# Altium PCB testSensor.PcbDoc
Units mm, origin at the board's own origin, x right, y up, seen from the top; angles counter-clockwise.
Board outline 152.4 x 101.6 mm, 2 copper layers (Top Layer, Bottom Layer); 37 components, 18 nets, 72 pads, 0 vias.
Unrouted connection lines stored in the file: 1.
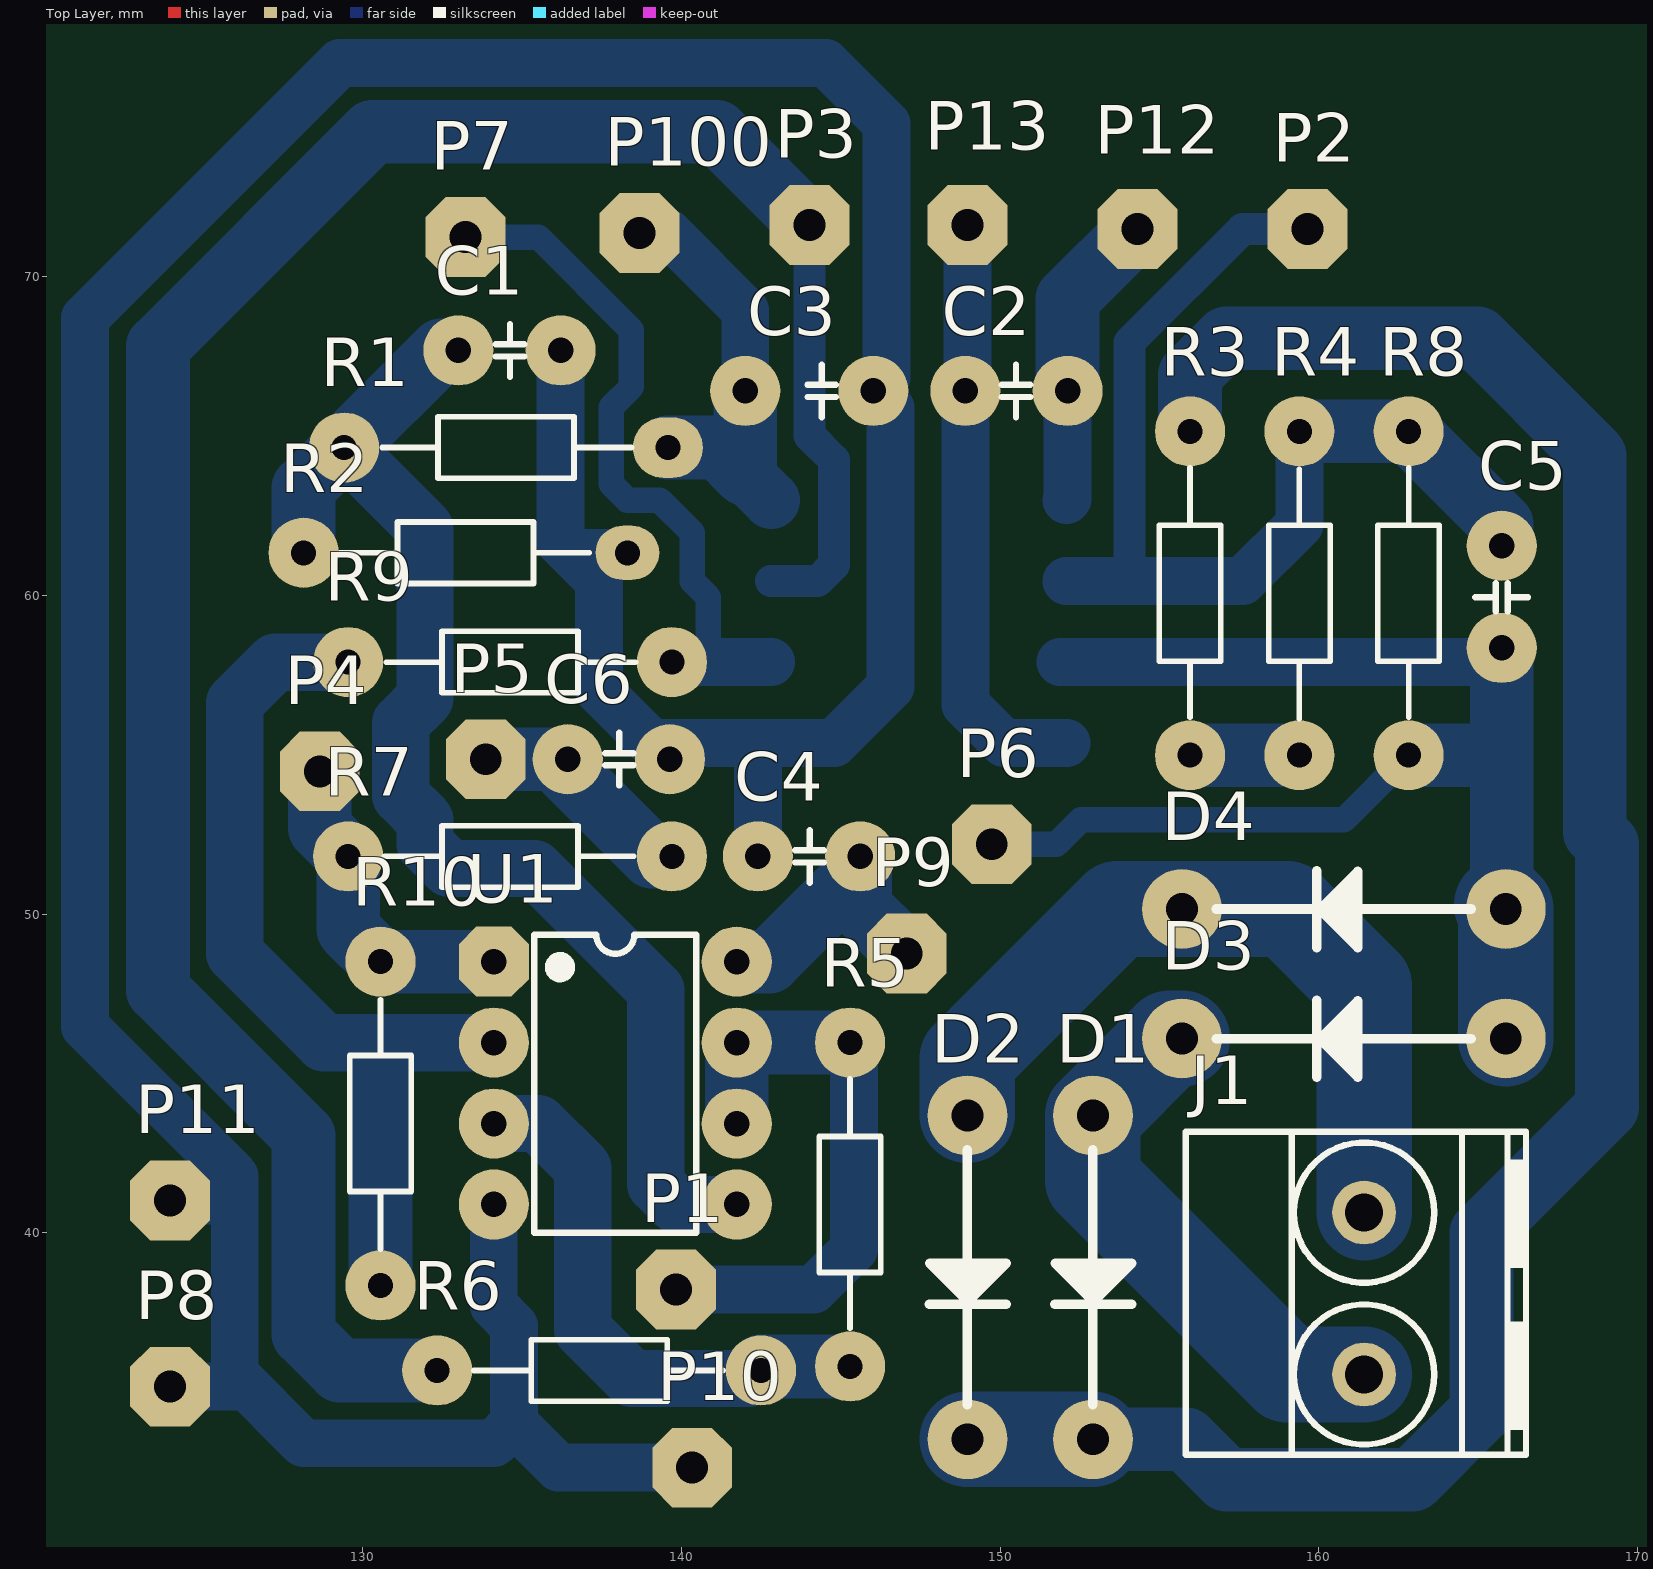
[diagram p0: Top Layer view]
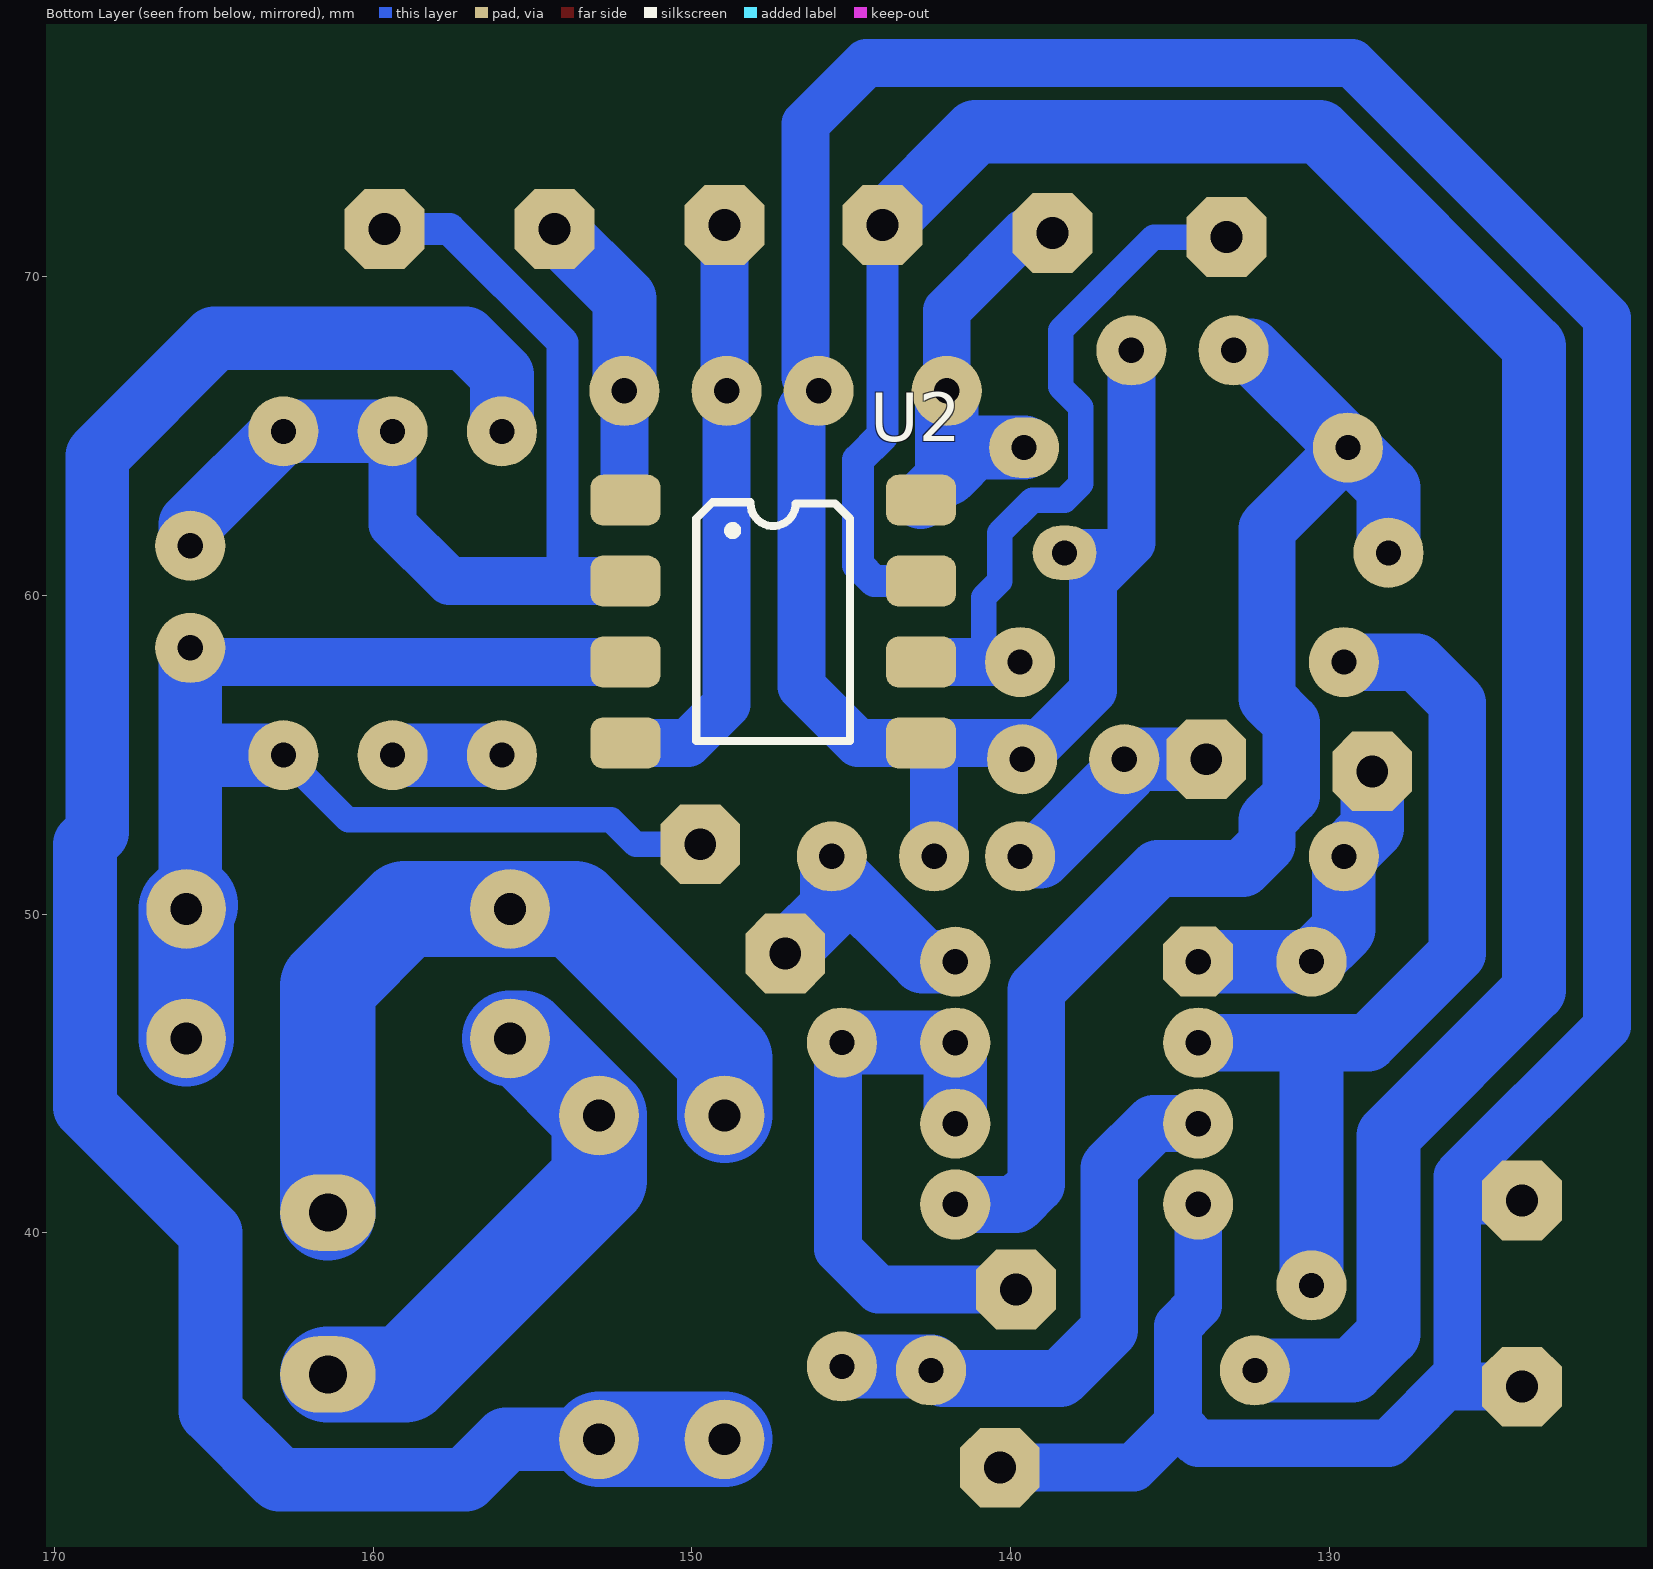
[diagram p1: Bottom Layer view, seen from below]
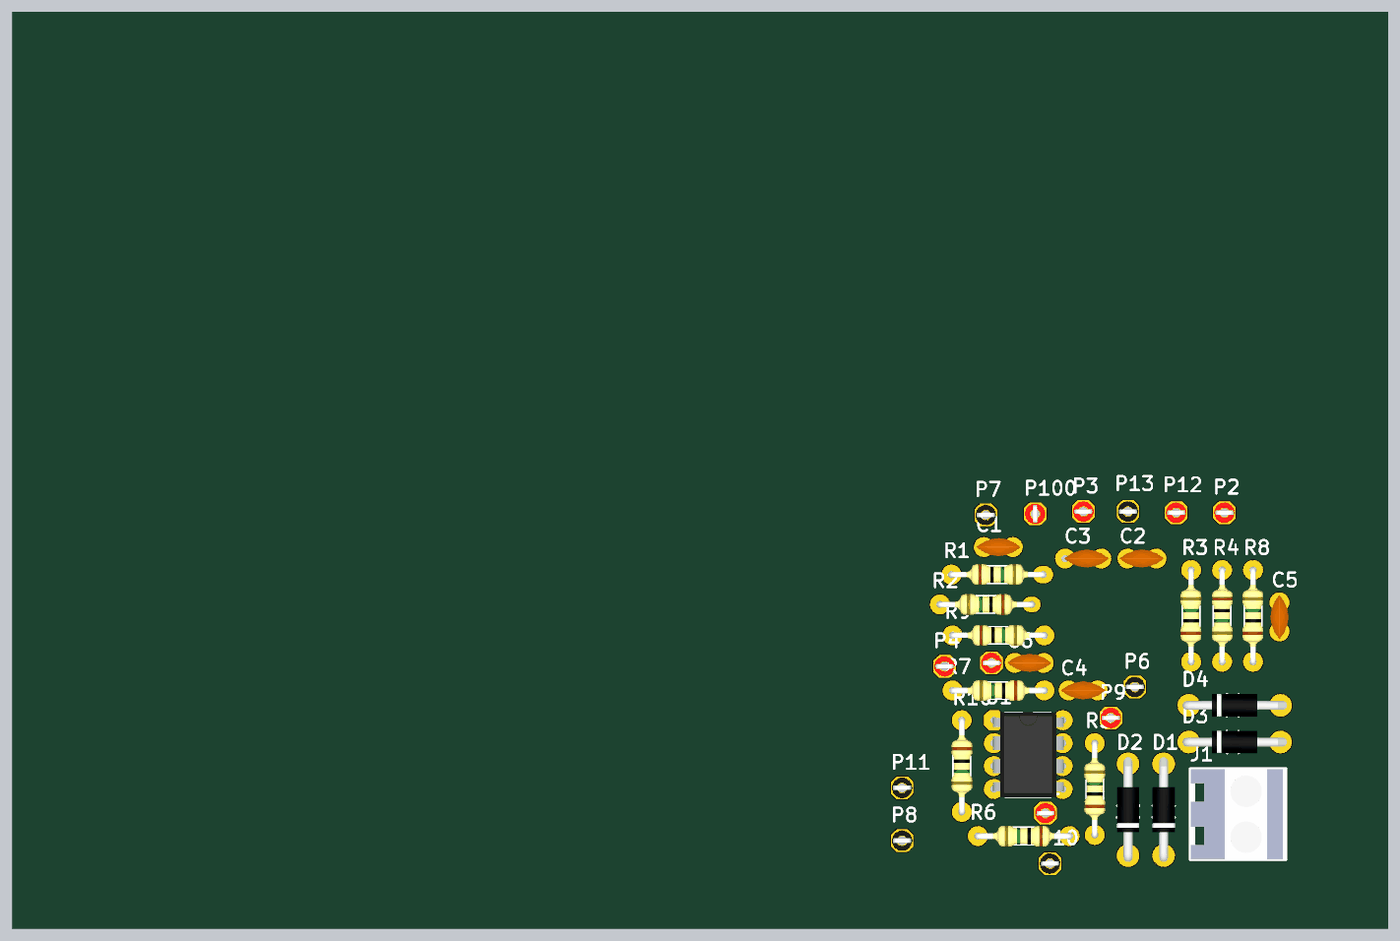
[diagram p2: 3D render of the assembled board from above, using the file's embedded part models]

## Layer stack, top to bottom
Top Solder: solder mask 0.0102, Solder Resist, Dk 3.5
Top Layer: signal copper 0.0356
Dielectric 1: dielectric 0.32, FR-4, Dk 4.8
Bottom Layer: signal copper 0.0356
Bottom Solder: solder mask 0.0102, Solder Resist, Dk 3.5

## Board outline
25.4,25.4 177.8,25.4 177.8,127 25.4,127

## Design rules (kind name [scope] priority, off if disabled: settings)
Clearance [All] p1: gap=0.254 ignorepadtopadclearanceinfootprint=FALSE except(0: Arc-Hole Track-Hole SMDPad-Hole THPad-Hole Via-Hole Fill-Hole Poly-Hole Region-Hole Text-Hole)
PolygonConnect [All] p1: connectstyle=Relief reliefconductorwidth=0.254 reliefentries=4 polygonreliefangle="90 Angle" airgapwidth=0.254
RoutingVias [All] p1: holewidth=0.711 width=1.27 viastyle="Through Hole" minholewidth=0.711 minwidth=1.27 maxholewidth=0.711 maxwidth=1.27
SolderMaskExpansion [All] p1: expansion=0.102 istentingtop=FALSE
Width [All] p1: maxlimit=3 minlimit=0.5 preferedwidth=2
30 further rules are at their usual default settings.

## Components (designator, comment, footprint, x,y, rotation, side; value= is the part's Value field where it differs from the comment)
C1 "104" "CAP 104"#1 134.62,67.691 r180 top value=0,047uF
C2 "104" "CAP 104"#1 150.495,66.421 r0 top value=0,047uF
C3 "104" "CAP 104"#2 144.399,66.421 r0 top value=0,047uF
C4 "104" "CAP 104"#1 144.018,51.816 r180 top value=0,047uF
C5 "103" "CAP 104"#1 165.735,59.944 r90 top value=0,047uF
C6 "102" "CAP 104"#1 138.049,54.864 r180 top value=0,047uF
D1 "DIODE DIP" 1N4007 152.908,43.688 r270 top value=1N4007
D2 "DIODE DIP" 1N4007 148.971,43.688 r270 top value=1N4007
D3 "DIODE DIP" 1N4007 165.862,46.101 r180 top value=1N4007
D4 "DIODE DIP" 1N4007 165.862,50.165 r180 top value=1N4007
J1 "CONN_TB2" TBG_2 161.417,38.1 r270 top
P1 "test PCB" tp_red_1p 139.827,38.227 r0 top
P2 "test PCB" tp_red_1p 159.639,71.501 r0 top
P3 "test PCB" tp_red_1p 144.018,71.628 r0 top
P4 "test PCB" tp_red_1p 128.651,54.483 r0 top
P5 "test PCB" tp_red_1p 133.858,54.864 r0 top
P6 "test PCB" Tp_black_1p 149.733,52.197 r0 top
P7 "test PCB" Tp_black_1p 133.223,71.247 r0 top
P8 "test PCB" Tp_black_1p 123.952,35.179 r0 top
P9 "test PCB" tp_red_1p 147.066,48.768 r0 top
P10 "test PCB" Tp_black_1p 140.335,32.639 r0 top
P11 "test PCB" Tp_black_1p 123.952,41.021 r0 top
P12 "test PCB" tp_red_1p 154.305,71.501 r0 top
P13 "test PCB" Tp_black_1p 148.971,71.628 r0 top
P100 "test PCB" tp_red_1p 138.684,71.374 r90 top
R1 "18K" R1/4W4#1 129.413,64.643 r0 top value="R1/4W - 1K"
R2 "2K" R1/4W4#2 138.303,61.341 r180 top value="R1/4W - 1K"
R3 "1M" R1/4W4#3 155.956,54.991 r90 top value="R1/4W - 1K"
R4 "1M" R1/4W4#3 159.385,65.151 r270 top value="R1/4W - 1K"
R5 "1.5K" R1/4W4#3 145.288,35.814 r90 top value="R1/4W - 1K"
R6 "1K" R1/4W4#3 142.494,35.687 r180 top value="R1/4W - 1K"
R7 "1K" R1/4W4#3 139.7,51.816 r180 top value="R1/4W - 1K"
R8 "1.2K" R1/4W4#3 162.814,54.991 r90 top value="R1/4W - 1K"
R9 "1K" R1/4W4#3 129.54,57.912 r0 top value="R1/4W - 1K"
R10 "1.5K" R1/4W4#3 130.556,48.514 r270 top value="R1/4W - 1K"
U1 "LM358" DIP-8_2.54_8_t/h 137.922,44.704 r0 top
U2 "HCPL 7800" SOP-8P 147.447,57.277 r180 bottom

## Footprints (in the part's own frame and the unit in brackets; to place one, negate y for a bottom-side part, rotate by r counter-clockwise, add the part's x,y. Pads: shape width x height; smd on the part's side, far side on the other; paste and mask are expansions set on the pad)
1N4007 [mm] "DIODE_DIP"
  round 2.5 hole 1 mask+0.1: 1(0,0) 2(10.16,0)
  silkscreen extent 1.08,-1.2 9.08,1.21, body extent -0.72,-1.25 10.88,1.25, height 2.75
"CAP 104"#1 [mm] "Capacitor, Electrolytic, Radial; Body 5 x 11 mm (Dia.xH typ); Pin Spacing 2 mm (typ)"
  round 2.2 hole 0.8: 1(-1.587,0) 2(1.619,0)
  silkscreen extent -0.44,-0.83 0.44,0.83, body extent -2.46,-1 2.46,1, height 6.46
"CAP 104"#2 [mm] "Capacitor, Electrolytic, Radial; Body 5 x 11 mm (Dia.xH typ); Pin Spacing 2 mm (typ)"
  round 2.2 hole 0.8: 1(-2.399,0) 2(1.619,0)
  silkscreen extent -0.44,-0.83 0.44,0.83, body extent -2.46,-1 2.46,1, height 6.46
DIP-8_2.54_8_t/h [mm]
  oct 2.2x2.2 hole 0.8: 1(-3.81,3.81)
  round 2.2 hole 0.8: 2(-3.81,1.27) 3(-3.81,-1.27) 4(-3.81,-3.81) 5(3.81,-3.81) 6(3.81,-1.27) 7(3.81,1.27) 8(3.81,3.81)
  silkscreen extent -2.54,-4.7 2.54,4.66, body extent -3.94,-4.7 3.93,4.7, height 4.36
R1/4W4#1 [mm] "R 1/4W, 2 Pin, 400mil"
  round 2.2 hole 0.787: 1(0,0)
  oval 2.2x1.9 hole 0.787: 2(10.16,0)
  silkscreen extent 1.19,-0.97 9.02,0.97, body extent -0.3,-1.14 10.46,1.17, height 2.93
R1/4W4#2 [mm] "R 1/4W, 2 Pin, 400mil"
  oval 2x1.7 hole 0.787: 1(0,0)
  round 2.2 hole 0.787: 2(10.16,0)
  silkscreen extent 1.19,-0.97 9.02,0.97, body extent -0.3,-1.14 10.46,1.17, height 2.93
R1/4W4#3 [mm] "R 1/4W, 2 Pin, 400mil"
  round 2.2 hole 0.787: 1(0,0) 2(10.16,0)
  silkscreen extent 1.19,-0.97 9.02,0.97, body extent -0.3,-1.14 10.46,1.17, height 2.93
SOP-8P [mm]
  rrect50% 2.2x1.6 smd: 1(-4.635,5.715) 2(-4.635,3.175) 3(-4.635,0.635) 4(-4.635,-1.905) 5(4.635,-1.905) 6(4.635,0.635) 7(4.636,3.175) 8(4.636,5.715)
  silkscreen extent -2.41,-1.84 2.41,5.65, body extent -4.76,-2.99 4.89,6.81, height 3.78
TBG_2 [mm] "Terminal Block Green"
  round 2 / inner round 2 / far side oval 2.4x3 hole 1.2: 1(-2.54,0) 2(2.54,0)
  silkscreen extent -5.08,-5.6 5.05,5.08, body extent -5,-5.5 5,5, height 14
Tp_black_1p [mm]
  oct 2.5x2.5 hole 1: 1(0,0)
  body extent -1.15,-1.15 1.15,1.15, height 5
tp_red_1p [mm]
  oct 2.5x2.5 hole 1: 1(0,0)
  body extent -1.15,-1.15 1.15,1.15, height 5

## Part data
C1 C2 C3 C4 C5 C6: library part "CAP Keo", "CAP Keo", Copyright=VanDungEvn
J1: "CONN, TERMINAL BLOCK, 5.08mm pitch"
P1 P2 P3 P4 P5 P6 P7 P8 P9 P10 P11 P12 P13 P100: "testpin"
R1 R2 R3 R4 R5 R6 R7 R8 R9 R10: library part "RES DIP", "RES DIP"
U1: "LM358 Dual Opamp"
U2: "HCPL 7800 Isolation Amplifer, Opamp"
D1 D2 D3 D4: ASSEMBLY=ASSEMBLY, DESC=DESCRIPTION, MANF=Kingtronics, MANF_P#=M7, PARAM="1000V VRRM", PARAM2=1A, PRICE=PRICE

## Nets (pads, with @x,y where several pads share a name; then routed paths per layer and width w, separated by ;. In a path a pad name is that pad's centre, name@x,y a point inside that pad or via, vN(x,y) a via of type N, cw(c..) or ccw(c..) an arc to the next point about the centre after c; other vN are vias at no path point)
5Vs: C2.2 P12.1 U2.1 | length 9.4
  Bottom Layer w1.5: U2.1 152.114,63.023 C2.2
  Bottom Layer w2: C2.2 152.114,69.31 P12.1
+5: C3.1 C4.1 P9.1 P100.1 R1.2 U1.8 U2.8 | length 22.3
  Bottom Layer w1.5: P100.1 139.573,71.374 142,68.947 C3.1
  Bottom Layer w1.8: 142,63.803 U2.8
  Bottom Layer w2: R1.2 141.16,64.643 142,63.803 142,64.643 C3.1 ; U1.8 142.748,48.514 C4.1@145.606,51.371 ; C4.1 C4.1@145.606,51.371 ; P9.1 145.415,50.419 145.606,50.609 C4.1@145.606,51.371
GND: C1.1 C3.2 C4.2 C6.1 P8.1 P10.1 P11.1 R2.1 U1.4 U2.5 | length 137.2
  Bottom Layer w1.5: P8.1 125.984,35.179 ; P11.1 125.222,41.021 125.984,41.783 ; 125.857,35.179 125.984,35.306 125.984,35.56 ; U1.4 134.112,37.719 134.747,37.084 134.747,34.036 ; C1.1 136.207,61.658 136.588,61.277 ; R2.1@137.922,61.341 136.652,61.341 136.588,61.277 ; P10.1 136.144,32.639 134.747,34.036 ; C4.2 142.399,54.96 U2.5 ; 125.984,35.56 125.984,41.783 ; 125.984,35.56 128.143,33.401 134.112,33.401 134.747,34.036 ; 125.984,41.783 121.285,46.482 121.285,68.707 129.286,76.708 144.526,76.708 146.431,74.803 146.431,66.834 C3.2 146.558,65.881 146.558,57.15 144.78,55.372 U2.5 ; 136.588,61.277 137.414,60.452 137.414,57.023 139.065,55.372 U2.5
GNDs: C2.1 P13.1 U2.4 | length 18.8
  Bottom Layer w1.5: P13.1 148.971,66.484 C2.1 148.907,56.578 150.114,55.372 U2.4
NetC1_2: C1.2 R1.1 R2.2 U1.5 | length 40.8
  Bottom Layer w1.8: R1.1 131.953,62.103 131.953,56.769 131.191,56.007 131.191,53.721 131.953,52.959 131.953,52.197 132.715,51.435 135.382,51.435 139.192,47.625 139.192,41.529 139.827,40.894 U1.5
  Bottom Layer w2: R2.2 128.143,63.373 R1.1 132.461,67.691 C1.2
NetC5_1: C5.1 D3.1 D4.1 P6.1 R8.1 U2.3 | length 43.4
  Bottom Layer w0.8: P6.1@149.86,52.07 149.987,52.197 151.765,52.197 152.527,52.959 160.782,52.959 R8.1
  Bottom Layer w1.5: U2.3@151.892,57.912 U2.3 165.29,57.912 C5.1
  Bottom Layer w2: R8.1 165.735,54.991 ; D4.1@165.735,50.292 165.735,54.991 ; C5.1 165.735,54.991
  Bottom Layer w3: D4.1@165.735,50.292 D4.1 D3.1
NetC5_2: C5.2 P2.1 R4.1 R8.2 U2.2 | length 33.9
  Bottom Layer w1: 153.924,60.452 154.051,60.579 ; 154.051,60.452 154.051,64.262 154.051,67.945 157.607,71.501 P2.1
  Bottom Layer w1.5: U2.2 153.924,60.452 157.607,60.452 159.385,62.23 R4.1
  Bottom Layer w2: R4.1 R8.2 165.735,62.23 C5.2
NetC6_2: C6.2 P5.1 R7.1 | length 7.3
  Bottom Layer w2: P5.1 C6.2 136.43,54.451 139.065,51.816 R7.1
NetD1_1: D1.1 D3.2 J1.2 | length 16.9
  Bottom Layer w3: D3.2 155.321,46.101 D1.1 152.908,41.656 159.004,35.56 J1.2
NetD1_2: D1.2 D2.2 R3.2 | length 65.8
  Bottom Layer w2: D1.2 155.829,33.528 157.099,32.258 162.941,32.258 165.1,34.417 165.1,40.005 169.037,43.942 169.037,52.197 168.656,52.578 168.656,64.389 164.973,68.072 157.099,68.072 155.956,66.929 R3.2
  Bottom Layer w3: D2.2 D1.2
NetD2_1: D2.1 D4.2 J1.1 | length 24.3
  Bottom Layer w3: D2.1 148.971,45.466 153.67,50.165 D4.2 159.004,50.165 161.417,47.752 J1.1
NetP1_1: P1.1 R5.2 U1.6 U1.7 | length 18.7
  Bottom Layer w1.5: P1.1 144.145,38.227 145.415,39.497 145.415,45.847 R5.2
  Bottom Layer w2: U1.6 U1.7 R5.2
NetP3_1: P3.1 R6.2 U2.7 | length 75.2
  Bottom Layer w1: U2.7 144.272,60.452 144.78,60.96 144.78,64.262 144.018,65.024 P3.1
  Bottom Layer w2: R6.2 129.286,35.687 128.143,36.83 128.143,43.053 123.571,47.625 123.571,67.818 130.302,74.549 141.097,74.549 P3.1
NetP4_1: P4.1 R7.2 R10.1 U1.1 | length 10.3
  Bottom Layer w2: P4.1 128.651,52.705 R7.2 129.54,49.53 R10.1 U1.1
NetP7_1: P7.1 R9.2 U2.6 | length 22.1
  Bottom Layer w0.8: P7.1 135.509,71.247 138.43,68.326 138.43,66.548 137.795,65.913 137.795,63.5 138.303,62.992 139.319,62.992 140.335,61.976 140.335,60.452 140.843,59.944 140.843,57.912
  Bottom Layer w1.5: R9.2 140.843,57.912 U2.6
NetR3_1: R3.1 R4.2 | length 3.4
  Bottom Layer w2: R3.1 R4.2
NetR5_1: R5.1 R6.1 U1.3 | length 17.6
  Bottom Layer w1.8: U1.3 135.509,43.434 136.906,42.037 136.906,36.957 138.43,35.433 142.113,35.433 R6.1@142.494,35.814
  Bottom Layer w2: R6.1@142.494,35.814 R5.1
NetR9_1: R9.1 R10.2 U1.2 | length 28.7
  Bottom Layer w1.8: R9.1 127.254,57.912 125.984,56.642 125.984,48.768 128.778,45.974 130.429,45.974 U1.2
  Bottom Layer w2: R10.2 130.556,45.847